# Altium PCB ZX_UNO_Aplus_HAT2.PcbDoc
Units mil, origin at the board's own origin, x right, y up, seen from the top; angles counter-clockwise.
Board outline 3395.53 x 2214.53 mil, 2 copper layers (Top Layer, Bottom Layer); 10 components, 42 nets, 87 pads, 1 vias.
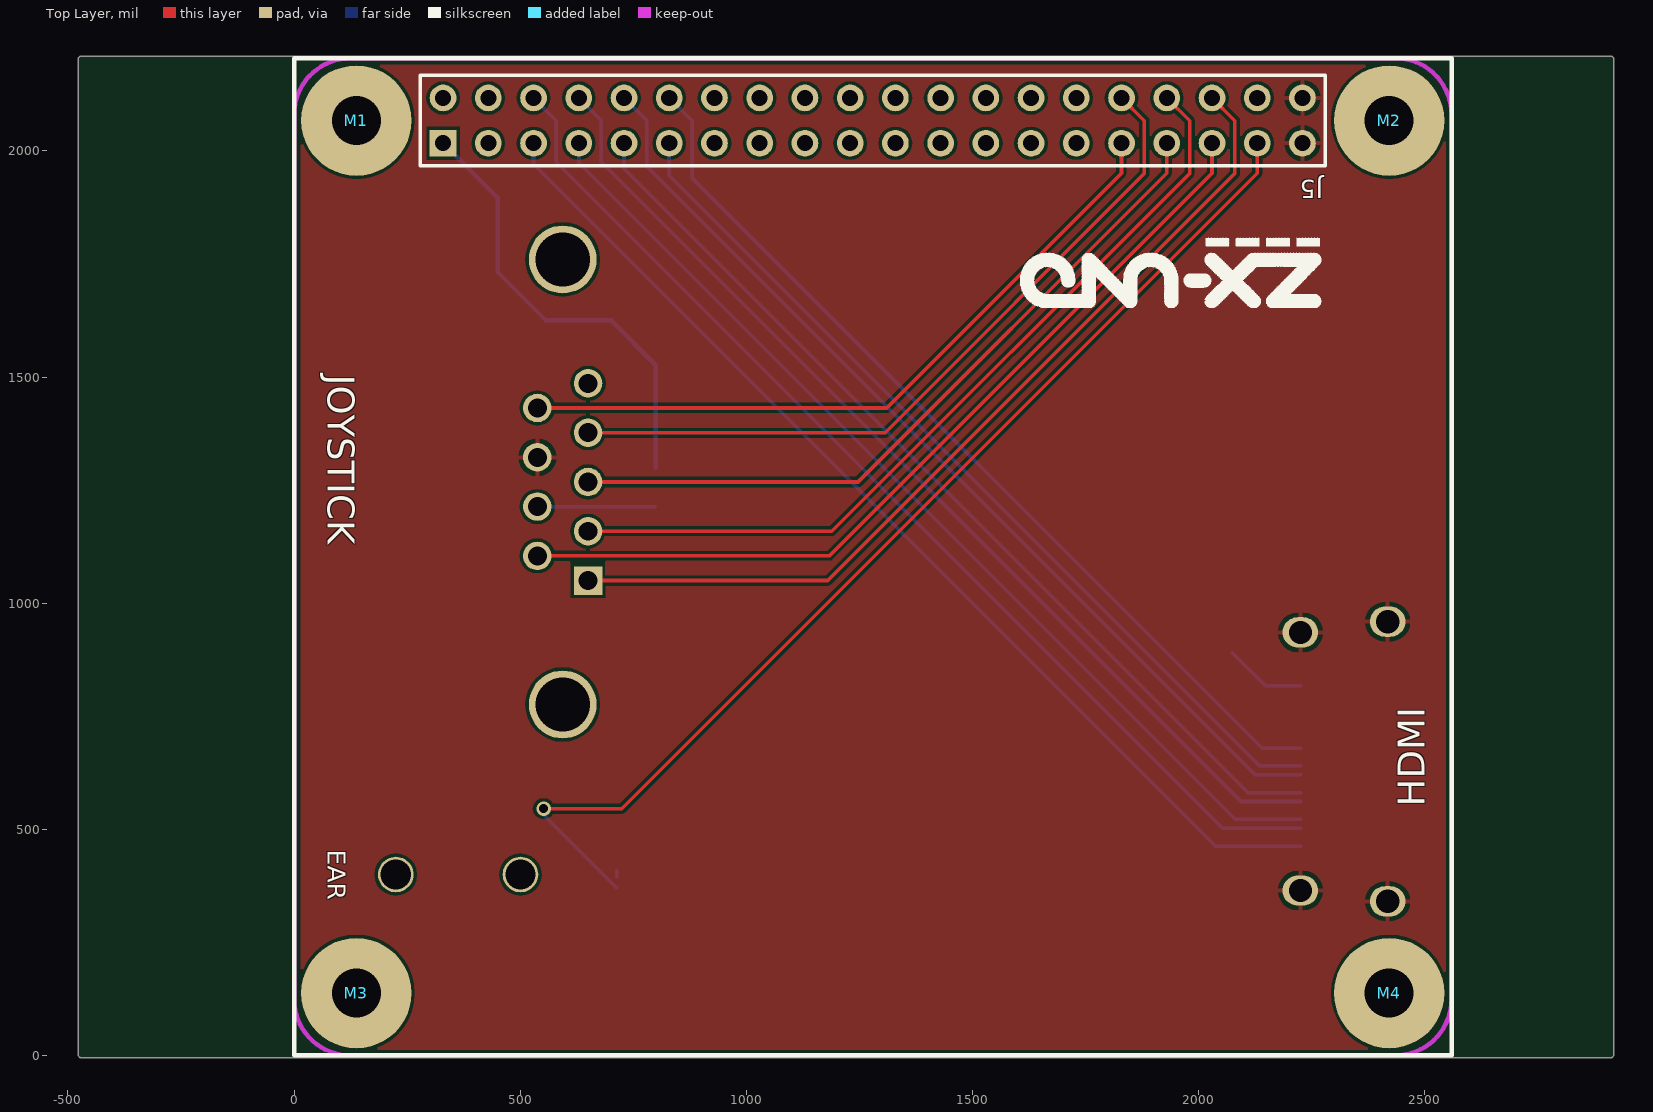
[diagram p0: Top Layer view]
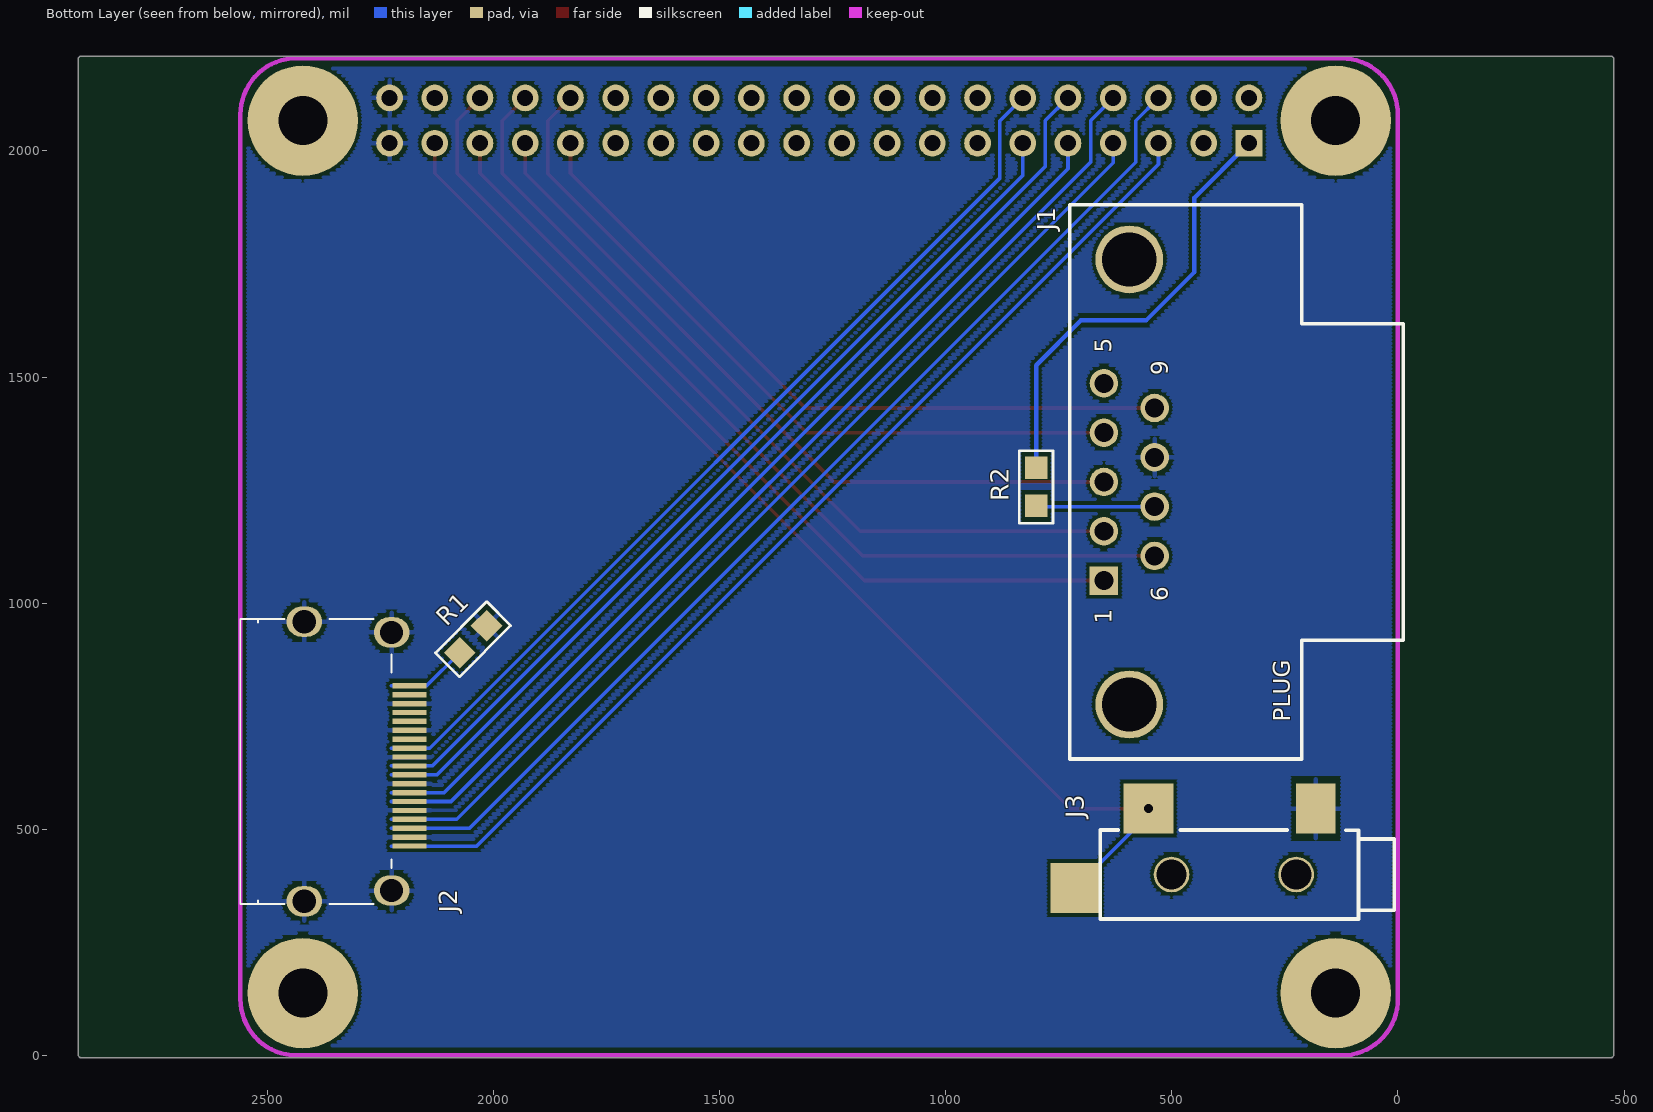
[diagram p1: Bottom Layer view, seen from below]

## Layer stack, top to bottom
Top Solder: solder mask 0.4, Solder Resist, Dk 3.5
Top Layer: signal copper 1.4
Dielectric1: core 12.6, FR-4, Dk 4.8
Bottom Layer: signal copper 1.4
Bottom Solder: solder mask 0.4, Solder Resist, Dk 3.5

## Board outline
-477.44,0 -472.44,-5 2913.09,-5 2918.09,0 2918.09,2204.53 2913.09,2209.53 -472.44,2209.53 -477.44,2204.53

## Design rules (kind name [scope] priority, off if disabled: settings)
Clearance [All] p1: gap=7
HoleSize [All] p1: absolutevalues=TRUE maxlimit=200 minlimit=1 maxpercent=80.000 minpercent=20.000
MinimumSolderMaskSliver [All] p1: minsoldermaskwidth=8
PlaneConnect [All] p1: planeconnectstyle=Relief reliefexpansion=25 reliefentries=4 reliefconductorwidth=12 reliefairgap=10
PolygonConnect [All] p1: connectstyle=Relief reliefconductorwidth=10 reliefentries=4 polygonreliefangle="90 Angle" airgapwidth=10
RoutingLayers RoutingLayers_1 [All] p1: top layer_v5=TRUE bottom layer_v5=TRUE
RoutingLayers [All] p2: top layer_v5=TRUE bottom layer_v5=TRUE
RoutingVias [All] p1: holewidth=20 width=37 viastyle="Through Hole" minholewidth=16 minwidth=28 maxholewidth=28 maxwidth=50
SilkToSilkClearance [All] p1: silktosilkclearance=5
SilkToSolderMaskClearance SilkscreenOverComponentPads [IsPad] p1: minsilkscreentomaskgap=5 clearancetoexposedcopper=TRUE
SolderMaskExpansion [All] p1: expansion=0
Width Net_Width_1 [InNet('1.2V') Or InNet('2.5V') Or InNet('3.3V') Or InNet('5V')] p1: maxlimit=12 minlimit=8 preferedwidth=10
Width [All] p2: maxlimit=12 minlimit=8 preferedwidth=10
24 further rules are at their usual default settings.

## Classes and differential pairs
component class ZX_UNO_Aplus_HAT2: J1 J2 J5 M1 M2 M3 M4 R1 R2

## Components (designator, comment, footprint, x,y, rotation, side; value= is the part's Value field where it differs from the comment)
J1 "JOYSTICK" DSUB/RP.318/TM/9 650,1050 r90 bottom
J2 "HDMI Connector" "HDMI 10029449" 2225,650 r270 bottom locked
J3 "Phonejack2 TN" "AUDIO  JACK MJ-3523-SMT" 225,400 r180 bottom locked
J5 "Header 20X2" HDR2X20 329.53,2016.93 r0 top locked
M1 "M2.5" M2.5#1 -722.44,2050 r0 top
M2 "M2.5" M2.5#2 3177.56,2070 r0 top
M3 "M2.5" M2.5#3 -792.44,-110 r0 top
M4 "M2.5" M2.5#4 3092.56,-175 r0 top
R1 "Res1" SM/R_0805 2015,950 r315 bottom
R2 "Res1" SM/R_0805 800,1215 r90 bottom

## Footprints (in the part's own frame and the unit in brackets; to place one, negate y for a bottom-side part, rotate by r counter-clockwise, add the part's x,y. Pads: shape width x height; smd on the part's side, far side on the other; paste and mask are expansions set on the pad)
"AUDIO  JACK MJ-3523-SMT" [mm]
  rect 2.2x2.8 smd: 1(1.1,3.7)
  rect 2.8x2.8 smd: 2(-8.3,3.7) 3(-12.4,-0.75)
  round 2 hole 1.7 unplated: 4(0,0) 5(-7,0)
  silkscreen extent -11,-2.5 5.5,2.5
DSUB/RP.318/TM/9 [mil]
  rect 63x63 hole 42: 1(0,0)
  round 63 hole 42: 2(109,0) 3(218,0) 4(327,0) 5(436,0) 6(54.5,-112) 7(163.5,-112) 8(272.5,-112) 9(381.5,-112)
  round 150 hole 120: Hole49(-274,-56) Hole50(710,-56)
  silkscreen extent -394,-662 830,76
"HDMI 10029449" [mm]
  oval 1.7x2 hole 1.3: 0(-7.85,-4.9) 0(-7.25,0) 0(7.25,0) 0(7.85,-4.9)
  rect 0.3x1.9 smd: 1(4.75,1) 2(4.25,1) 3(3.75,1) 4(3.25,1) 5(2.75,1) 6(2.25,1) 7(1.75,1) 8(1.25,1) 9(0.75,1) 10(0.25,1) 11(-0.25,1) 12(-0.75,1) 13(-1.25,1) 14(-1.75,1) 15(-2.25,1) 16(-2.75,1) 17(-3.25,1) 18(-3.75,1) 19(-4.25,1)
  silkscreen extent -8,-8.5 8,0
HDR2X20 [mm] "Connector; Header; 20x2 Position"
  rect 1.5x1.5 hole 0.9: 1(0,0)
  round 1.5 hole 0.9: 2(0,2.54) 3(2.54,0) 4(2.54,2.54) 5(5.08,0) 6(5.08,2.54) 7(7.62,0) 8(7.62,2.54) 9(10.16,0) 10(10.16,2.54) 11(12.7,0) 12(12.7,2.54) 13(15.24,0) 14(15.24,2.54) 15(17.78,0) 16(17.78,2.54) 17(20.32,0) 18(20.32,2.54) 19(22.86,0) 20(22.86,2.54) 21(25.4,0) 22(25.4,2.54) 23(27.94,0) 24(27.94,2.54) 25(30.48,0) 26(30.48,2.54) 27(33.02,0) 28(33.02,2.54) 29(35.56,0) 30(35.56,2.54) 31(38.1,0) 32(38.1,2.54) 33(40.64,0) 34(40.64,2.54) 35(43.18,0) 36(43.18,2.54) 37(45.72,0) 38(45.72,2.54) 39(48.26,0) 40(48.26,2.54)
  silkscreen extent -1.27,-1.27 49.53,3.81
M2.5#1 [mm]
  round 6.2 hole 2.75: ""(21.85,0.43)
M2.5#2 [mm]
  round 6.2 hole 2.75: ""(-19.21,-0.078)
M2.5#3 [mm]
  round 6.2 hole 2.75: ""(23.628,6.294)
M2.5#4 [mm]
  round 6.2 hole 2.75: ""(-17.051,7.945)
SM/R_0805 [mil]
  rect 50x50 smd: 1(0,0) 2(84,0)
  silkscreen extent -38,-37 122,37

## Part data
J1: library part "CONNECTOR DB9"
J2: library part D-300-0056, "HDMI, SMD, R/A KDMIX-NS1-WS-B"
J3: "Jack Socket, 3.5mm, Thru-Hole, Vertical, 2-Conductor with Tip closed"
J5: "Header, 20-Pin, Dual row"
R1 R2: "Resistor"

## Via types
v1: diameter 32, hole 20, Top Layer to Bottom Layer, 1 vias

## Nets (pads, with @x,y where several pads share a name; then routed paths per layer and width w, separated by ;. In a path a pad name is that pad's centre, name@x,y a point inside that pad or via, vN(x,y) a via of type N, cw(c..) or ccw(c..) an arc to the next point about the centre after c; other vN are vias at no path point)
3.3V: J5.2
5V: J5.1 R2.2 | length 997.2
  Bottom Layer w10: J5.1 450,1896.46 450,1732 557,1625 701,1625 800,1526 R2.2
CLK+: J2.10 J5.11 | length 2008.2
  Bottom Layer w8: J5.11 829.53,1945.47 2134.84,640.16 2225.63,640.16
CLK-: J2.12 J5.12 | length 2065.6
  Bottom Layer w8: J5.12 880,2066.46 880,1940 2140.47,679.53 2225.63,679.53
D0+: J2.7 J5.9 | length 2123.9
  Bottom Layer w8: J5.9 729.53,1960.47 2108.9,581.1 2225.63,581.1
D0-: J2.9 J5.10 | length 2175.4
  Bottom Layer w8: J5.10 779.53,2066.93 779.53,1965.47 2124.53,620.47 2225.63,620.47
D1+: J2.4 J5.7 | length 2240.8
  Bottom Layer w8: J5.7 629.53,1973.47 2080.95,522.05 2225.63,522.05
D1-: J2.6 J5.8 | length 2294
  Bottom Layer w8: J5.8 679.53,2066.93 679.53,1975.47 2093.58,561.42 2225.63,561.42
D2+: J2.1 J5.5 | length 2367
  Bottom Layer w8: J5.5 529.53,1970.47 2037.01,462.99 2225.63,462.99
D2-: J2.3 J5.6 | length 2418.5
  Bottom Layer w8: J5.6 580,2066.46 580,1975 2052.64,502.36 2225.63,502.36
EAR: J3.2 J3.3 J5.37 | length 2481.9
  Top Layer w8: v1(551.77,545.67) 724.72,545.67 2129.53,1950.47 J5.37
  Bottom Layer w8: v1(551.77,545.67) 551.77,531.89 J3.3 ; J3.3@713.19,395.47 J3.3@713.19,409.25
EXT1: J5.3
EXT2: J5.4
EXT11: J5.13
EXT12: J5.14
EXT13: J5.15
EXT14: J5.16
EXT15: J5.17
EXT16: J5.18
EXT17: J5.19
EXT18: J5.20
EXT19: J5.21
EXT20: J5.22
EXT21: J5.23
EXT22: J5.24
EXT23: J5.25
EXT24: J5.26
EXT25: J5.27
EXT26: J5.28
EXT27: J5.29
EXT28: J5.30
EXT36: J5.38
GND: J1.8 J2.0 J2.2 J2.5 J2.8 J2.11 J2.14 J2.17 J3.1 J5.39 J5.40 R1.1
JOY_DOWN: J1.2 J5.34 | length 1845.5
  Top Layer w8: J1.2 1189,1159 1980,1950 1980,2066.46 J5.34
JOY_FIRE1: J1.6 J5.35 | length 1908.4
  Top Layer w8: J1.6 1183.56,1104.5 2029.53,1950.47 J5.35
JOY_FIRE2: J1.9 J5.31 | length 1572.9
  Top Layer w8: J1.9 1310.56,1431.5 1829.53,1950.47 J5.31
JOY_LEFT: J1.3 J5.33 | length 1628.7
  Top Layer w8: J1.3 1247.06,1268 1929.53,1950.47 J5.33
JOY_RIGHT: J1.4 J5.32 | length 1655.2
  Top Layer w8: J1.4 1307,1377 1880,1950 1880,2066.46 J5.32
JOY_UP: J1.1 J5.36 | length 1990.6
  Top Layer w8: J1.1 1180,1050 2080,1950 2080,2066.46 J5.36
NetJ2_19: J2.19 R1.2 | length 181.6
  Bottom Layer w8: R1.2 2147.68,817.32 2225.63,817.32
PIN5: J1.5
PIN7: J1.7 R2.1 | length 260.5
  Bottom Layer w8: J1.7 R2.1@798.5,1213.5
pads on no net: J1.Hole49 J1.Hole50 J2.13 J2.15 J2.16 J2.18 J3.4 J3.5 M1. M2. M3. M4.

## Polygon pours and split planes (outlines as drawn)
GND on Bottom Layer "543" (hatched Horizontal grid 8 track 8, remove dead copper, pour order 0): 2550.91,1.28 3.31,1.28 3.31,2190.65 2550.91,2190.65
GND on Top Layer "Top Layer-No Net" (solid, pour order 2): 15,2190 2550,2190 2550,10 15,10

## Keep-outs
Keep-Out Layer:
  lines w10: 2435,2204.53 125,2204.53 ccw(c124.77,2079.77) 0,2080 0,125 ccw(c125,125) 125,0 600,0 1855,0 2435,0 ccw(c2434.53,124.53) 2559.06,125 2559.06,949.06 2559.06,2080 ccw(c2434.53,2080.47) 2435,2205

## Silkscreen, mask and mechanical layers (free items; w line width, h text height)
Top Overlay:
  drawing of 11 lines, arcs and shapes, not listed
  text "JOYSTICK" at 75,1505 h60 r270
  text "HDMI" at 2500,550 h60 r90
  text "EAR" at 75,455 h40 r270

## Text inside footprints (layer, text, board x,y; h text height)
J1: Bottom Overlay "9" at 507.37,1504.12 h37.5 r270; Bottom Overlay "6" at 507.37,1004.12 h37.5 r270; Bottom Overlay "5" at 632.37,1554.12 h37.5 r270; Bottom Overlay "1" at 632.37,954.12 h37.5 r270; Bottom Overlay "PLUG" at 238.37,737.45 h37.5 r270; Mechanical 1 "9" at 507.37,1504.12 h37.5 r270; Mechanical 1 "6" at 507.37,1004.12 h37.5 r270; Mechanical 1 "5" at 632.37,1554.12 h37.5 r270; Mechanical 1 "1" at 632.37,954.12 h37.5 r270; Mechanical 1 "PLUG" at 238.37,737.45 h37.5 r270